# Altium PCB PCB1.PcbDoc
Units mil, origin at the board's own origin, x right, y up, seen from the top; angles counter-clockwise.
Board outline 3838.58 x 3838.58 mil, 2 copper layers (Top Layer, Bottom Layer); 128 components, 103 nets, 393 pads, 108 vias.
Unrouted connection lines stored in the file: 1.
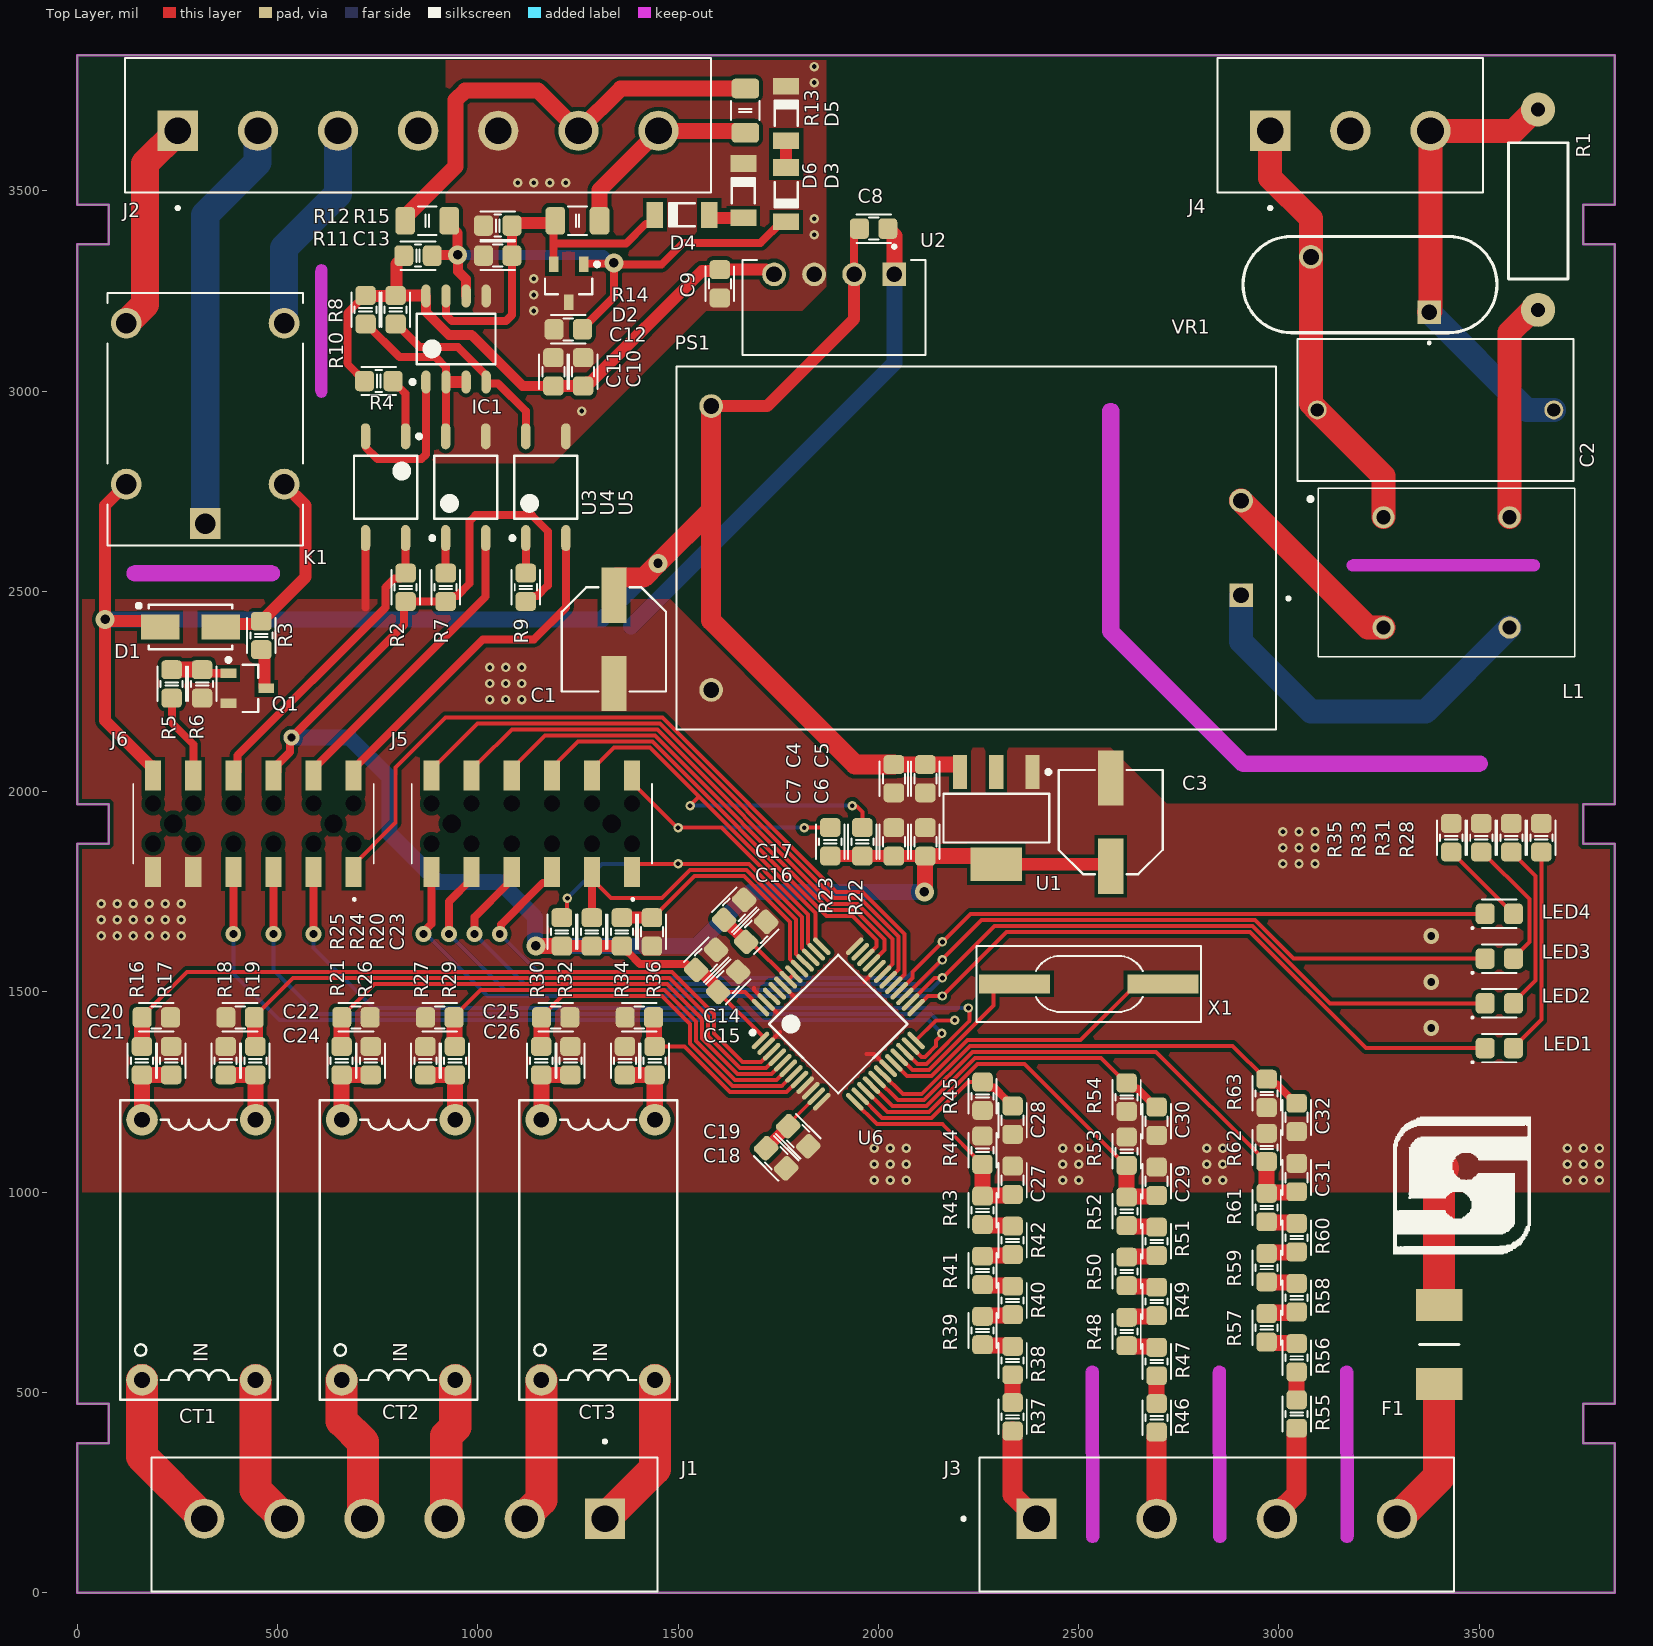
[diagram p0: Top Layer view]
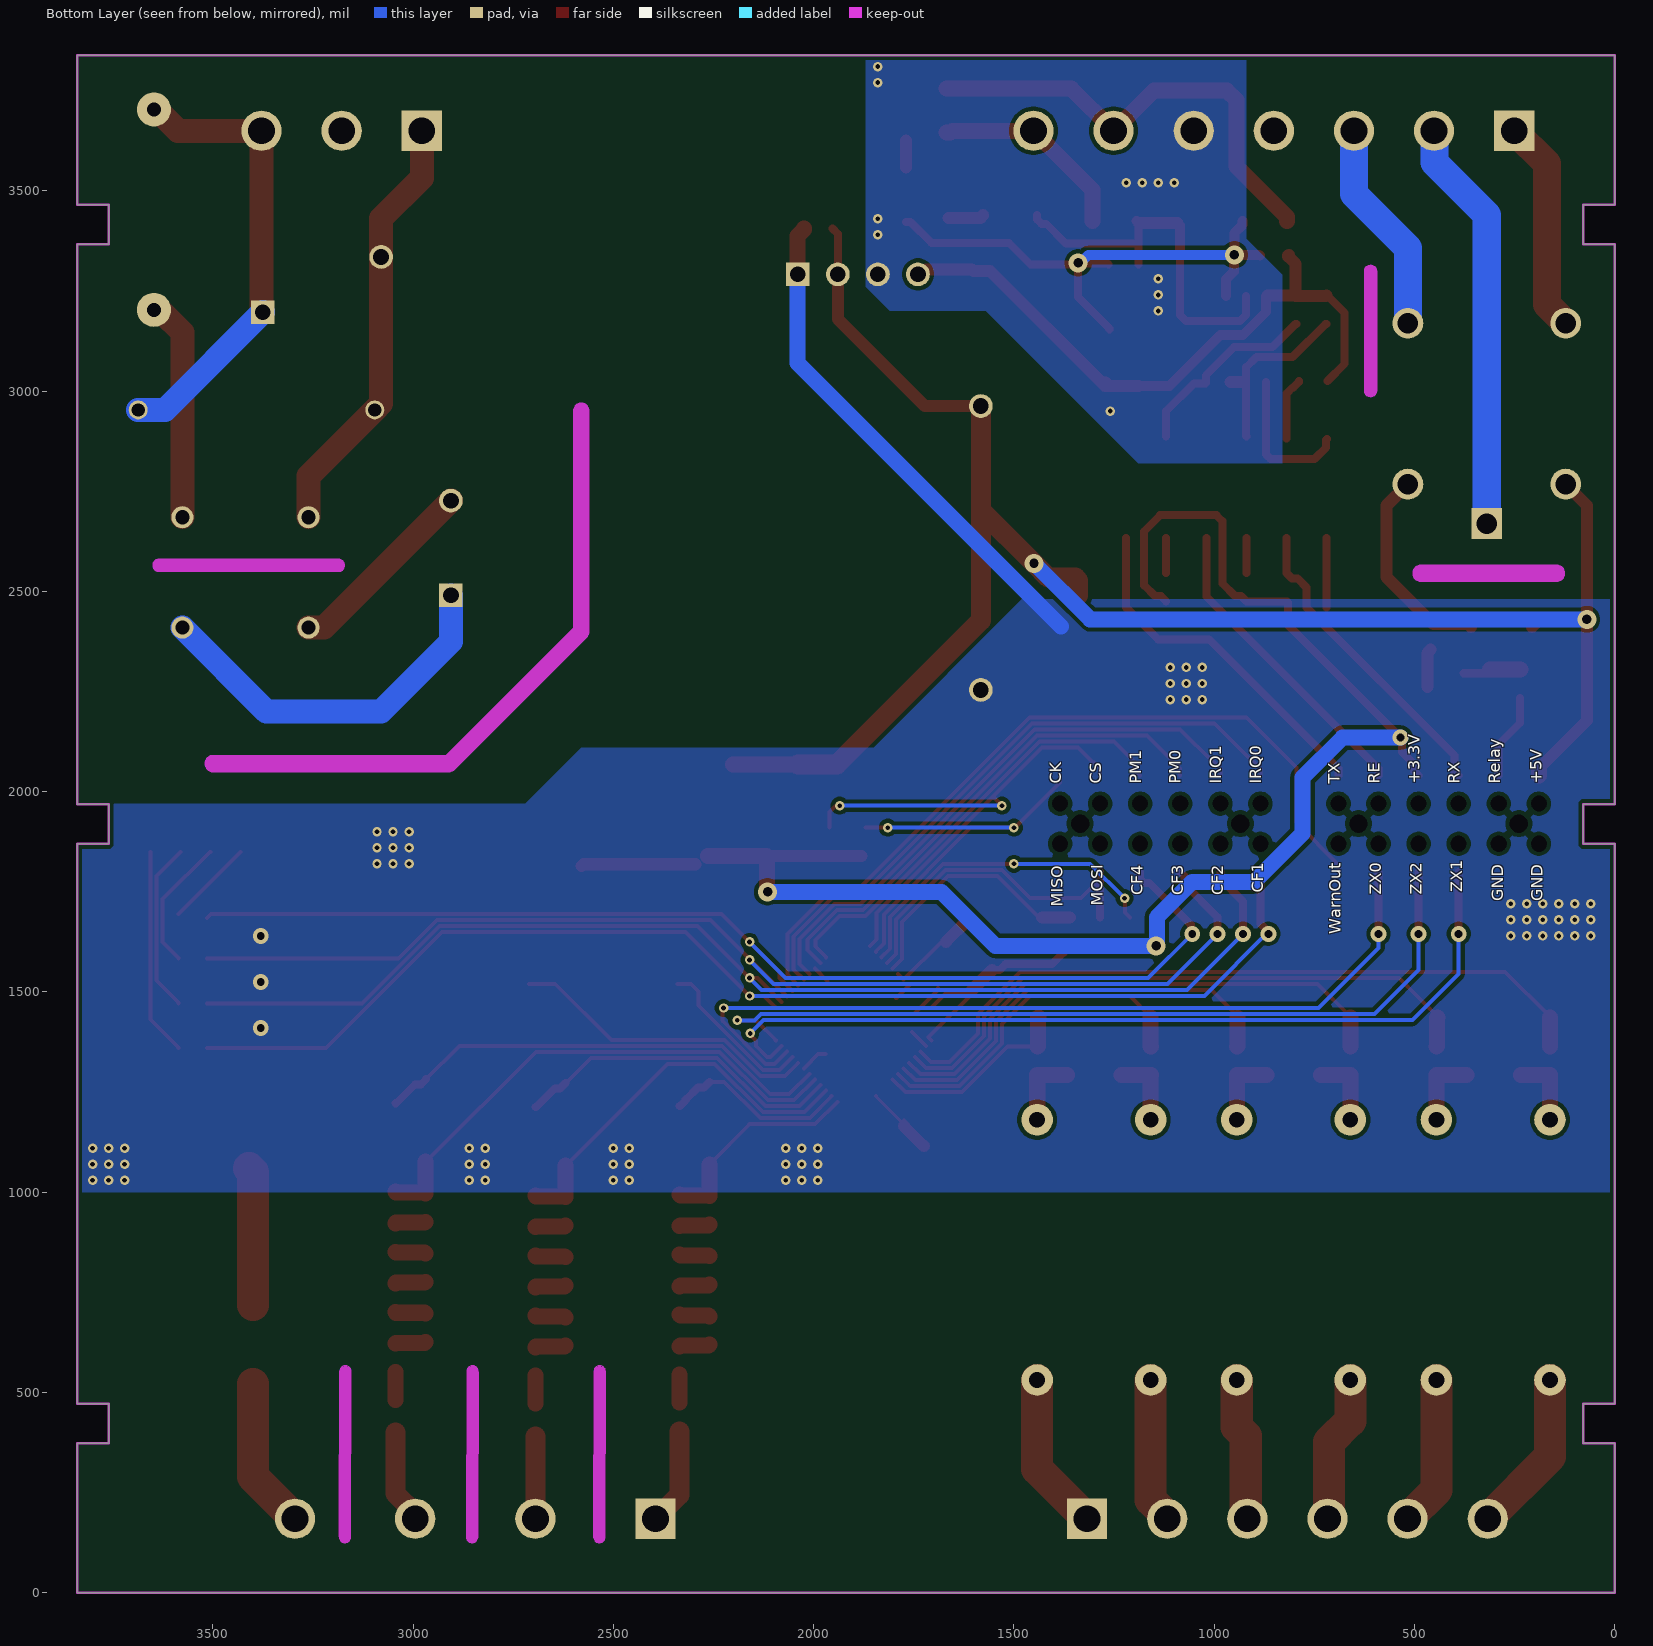
[diagram p1: Bottom Layer view, seen from below]
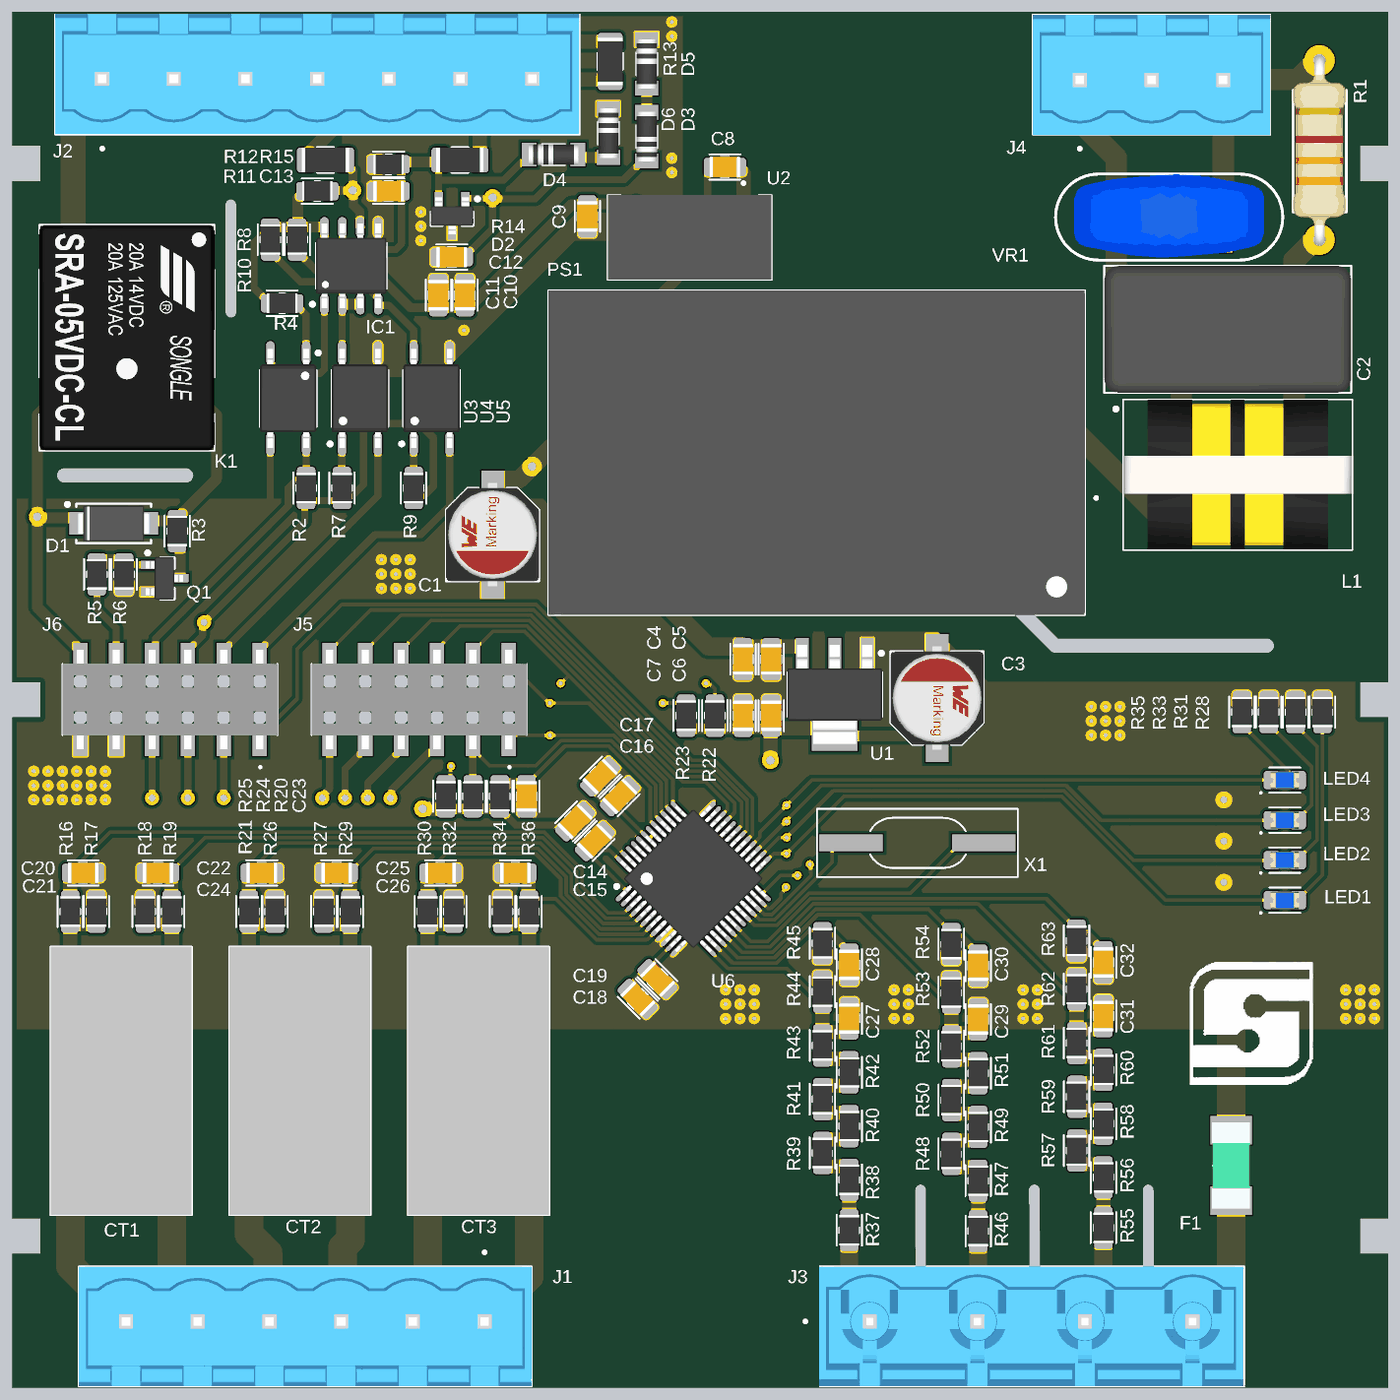
[diagram p2: 3D render of the assembled board from above, using the file's embedded part models]

## Layer stack, top to bottom
Top Solder: solder mask 0.4, Solder Resist, Dk 3.5
Top Layer: signal copper 1.4
Dielectric 1: dielectric 12.6, FR-4, Dk 4.8
Bottom Layer: signal copper 1.4
Bottom Solder: solder mask 0.4, Solder Resist, Dk 3.5

## Board outline
0,0 0,374.02 78.74,374.02 78.74,472.44 0,472.44 0,1870.08 78.74,1870.08 78.74,1968.5 0,1968.5 0,3366.14 78.74,3366.14 78.74,3464.57 0,3464.57 0,3838.58 3838.58,3838.58 3838.58,3464.57 3759.84,3464.57 3759.84,3366.14 3838.58,3366.14 3838.58,1968.5 3759.84,1968.5 3759.84,1870.08 3838.58,1870.08 3838.58,472.44 3759.84,472.44 3759.84,374.02 3838.58,374.02 3838.58,0
cut-out: 3154.99,139.96 3153.99,551.96 cw(c3169,552) 3184.01,552.04 3185.01,140.04 3185.01,140 cw(c3170,140)
cut-out: 2837.49,139.96 2836.49,551.96 cw(c2851.5,552) 2866.51,552.04 2867.51,140.04 2867.51,140 cw(c2852.5,140)
cut-out: 2519.99,139.96 2518.99,551.96 cw(c2534,552) 2549.01,552.04 2550.01,140.04 2550.01,140 cw(c2535,140)
cut-out: 3185,2549.99 cw(c3185,2565) 3185,2580.01 3635,2580.01 cw(c3635,2565) 3650.01,2565 cw(c3635,2565) 3635,2549.99
cut-out: 2565.88,2385.81 cw(c2580,2400) 2559.99,2400 2559.99,2950 cw(c2580,2950) 2600.01,2950 2600.01,2408.29 2918.29,2090.01 3500,2090.01 cw(c3500,2070) 3520.01,2070 cw(c3500,2070) 3500,2049.99 2910,2049.99 cw(c2910,2070) 2895.81,2055.88 2895.85,2055.85
cut-out: 594.99,3000 ccw(c610,3000) 625.01,3000 625.01,3300 ccw(c610,3300) 594.99,3300
cut-out: 145,2524.99 cw(c145,2545) 145,2565.01 485,2565.01 cw(c485,2545) 505.01,2545 cw(c485,2545) 485,2524.99

## Design rules (kind name [scope] priority, off if disabled: settings)
Clearance [All] p1: gap=10 ignorepadtopadclearanceinfootprint=FALSE except(5: Arc-Arc Arc-Track Arc-SMDPad Track-Track Track-SMDPad SMDPad-SMDPad)
MinimumSolderMaskSliver [All] p1: minsoldermaskwidth=5
PolygonConnect [All] p1: connectstyle=Direct reliefconductorwidth=10 reliefentries=4 polygonreliefangle="90 Angle" airgapwidth=10
RoutingVias small [All] p1: holewidth=11.81 width=19.68 viastyle="Through Hole" minholewidth=11.42 minwidth=19.29 maxholewidth=24.02 maxwidth=47.64
SilkToSilkClearance [All] p1: silktosilkclearance=5
SilkToSolderMaskClearance [IsPad] p1: minsilkscreentomaskgap=3 clearancetoexposedcopper=TRUE
SolderMaskExpansion [All] p1: expansion=4 istentingtop=FALSE
SupplyNets "Schematic Supply Nets_4" [InNet('+5V')] p1: voltage=0.000
SupplyNets "Schematic Supply Nets_3" [InNet('GND_RS485')] p2: voltage=0.000
SupplyNets "Schematic Supply Nets_2" [InNet('GND')] p3: voltage=0.000
SupplyNets "Schematic Supply Nets_1" [InNet('+5V_RS485')] p4: voltage=0.000
SupplyNets "Schematic Supply Nets" [InNet('+3.3V')] p5: voltage=0.000
Width [All] p1: maxlimit=80 minlimit=10 preferedwidth=20
27 further rules are at their usual default settings.

## Classes and differential pairs
component class Sheet3: C14 C15 C16 C17 C18 C19 C20 C21 C22 C23 C24 C25 C26 C27 C28 C29 C30 C31 C32 CT1 CT2 CT3 F1 J5 J6 LED1 LED2 LED3 LED4 R16 R17 R18 R19 R20 R21 R22 R23 R24 R25 R26 R27 R28 R29 R30 R31 R32 R33 R34 R35 R36 R37 R38 R39 R40 R41 R42 R43 R44 R45 R46 R47 R48 R49 R50 R51 R52 R53 R54 R55 R56 R57 R58 R59 R60 R61 R62 R63 U6 X1
component class Sheet2: C1 C2 C3 C4 C5 C6 C7 C8 C9 C10 C11 C12 C13 D1 D2 D3 D4 D5 D6 IC1 J1 J2 J3 J4 K1 L1 PS1 Q1 R1 R2 R3 R4 R5 R6 R7 R8 R9 R10 R11 R12 R13 R14 R15 U1 U2 U3 U4 U5 VR1

## Components (designator, comment, footprint, x,y, rotation, side; value= is the part's Value field where it differs from the comment)
C1 "220u/6.3V" CAP-ALU-SMD-6.3x7.7x2.2 1340,2380 r270 top
C2 "0.1u/660V" CAPRR1500W60L1750T900H1600 3390.75,2952.76 r0 top
C3 "100u/6.3V" CAP-ALU-SMD-6.3x7.7x2.2 2580,1924.13 r90 top
C4 "10u/6.3V" CAP_C_2012X110 2038.66,2032.4 r90 top
C5 "0.1u/6.3V" CAP_C_2012X110 2117.4,2032.4 r90 top
C6 "10u/6.3V" CAP_C_2012X110 2117.4,1874.61 r270 top
C7 "0.1u/6.3V" CAP_C_2012X110 2038.66,1874.61 r270 top
C8 "4.7u/6.3V" CAP_C_2012X110 1988.19,3405.51 r180 top
C9 "10u/6.3V" CAP_C_2012X110 1604.33,3267.72 r90 top
C10 "10u/6.3V" CAP_C_2012X110 1263,3048 r270 top
C11 "0.1u/6.3V" CAP_C_2012X110 1189,3048 r270 top
C12 "0.1n/16V" CAP_C_2012X110 1226,3154 r0 top
C13 "0.1n/16V" CAP_C_2012X110 1050,3338 r0 top
C14 "0.1u/16V" CAP_C_2012X110 1570,1580 r225 top
C15 "0.1u/16V" CAP_C_2012X110 1625,1525 r225 top
C16 "0.1u/16V" CAP_C_2012X110 1695,1650 r225 top
C17 "10u/16V" CAP_C_2012X110 1640,1705 r225 top
C18 "0.1u/16V" CAP_C_2012X110 1745,1085 r135 top
C19 "4.7u/16V" CAP_C_2012X110 1800,1140 r135 top
C20 "18n/16V" CAP_C_2012X110 197.87,1436.47 r180 top
C21 "18n/16V" CAP_C_2012X110 406.87,1436.47 r180 top
C22 "18n/16V" CAP_C_2012X110 696.22,1436.47 r180 top
C23 "0.1u/16V" CAP_C_2012X110 1435,1650 r90 top
C24 "18n/16V" CAP_C_2012X110 905.22,1436.47 r180 top
C25 "18n/16V" CAP_C_2012X110 1194.57,1436.47 r180 top
C26 "18n/16V" CAP_C_2012X110 1403.57,1436.47 r180 top
C27 "18n/16V" CAP_C_2012X110 2335,1030 r270 top
C28 "18n/16V" CAP_C_2012X110 2335,1180 r90 top
C29 "18n/16V" CAP_C_2012X110 2694.62,1027.54 r270 top
C30 "18n/16V" CAP_C_2012X110 2694.62,1177.54 r90 top
C31 "18n/16V" CAP_C_2012X110 3044.03,1036.83 r270 top
C32 "18n/16V" CAP_C_2012X110 3044.03,1186.83 r90 top
CT1 "ZHT107(5A/2.5mA)" ZHT107 303.82,856.3 r90 top
CT2 "ZHT107(5A/2.5mA)" ZHT107 802.17,856.3 r90 top
CT3 "ZHT107(5A/2.5mA)" ZHT107 1300.51,856.3 r90 top
D1 "DR_1KV_1A" DIOM5025X26N 283,2411 r0 top value=1N5007
D2 "SM712-02HTG" SOT95P237X112-3N 1227,3269 r270 top
D3 "DZ_12V" LL-34 1770,3490 r90 top
D4 "DZ_12V" LL-34 1510,3440 r0 top
D5 "DZ_7V" LL-34 1770,3693.11 r270 top
D6 "DZ_7V" LL-34 1663.08,3500 r270 top
F1 "F_1A" FUSC6127X294N 3400,620 r90 top value=Fuse
IC1 "MAX485" SOIC-8 945.87,3129.92 r90 top
J1 "TBP01R2-508-06BE" CUI_TBP01R2-508-06BE 1317.52,185.04 r180 top
J2 "TBP01R2-508-07BE" CUI_TBP01R2-508-07BE 251.38,3649.61 r0 top
J3 "TBP05R2-762-04BE" CUI_TBP05R2-762-04BE 2394.68,185.04 r0 top
J4 "TBP01R2-508-03BE" CUI_TBP01R2-508-03BE 3178.15,3649.61 r0 top
J5 "SSM-106-S-DV" SSM-106-XXX-DV-BE 1135,1920 r0 top
J6 "SSM-106-S-DV" SSM-106-XXX-DV-BE 440,1920 r0 top
K1 "SRA-05VDC-CL" RELAY_SRA-05VDC-CL 319.88,2929.13 r90 top
L1 "10mH" UU98LFH142LF 3418.31,2547.24 r0 top
LED1 "LED" LED-0805-Blue 3550,1360 r0 top value="LED 3 - 5 ly 2 Colour"
LED2 "LED" LED-0805-Blue 3550,1471.67 r0 top value="LED 3 - 5 ly 2 Colour"
LED3 "LED" LED-0805-Blue 3550,1583.33 r0 top value="LED 3 - 5 ly 2 Colour"
LED4 "LED" LED-0805-Blue 3550,1695 r0 top value="LED 3 - 5 ly 2 Colour"
PS1 "HLK-5M05" CONV_HLK-5M05 2244.09,2608.27 r180 top
Q1 "BC817W" SOT95P237X112-3N 425,2258 r0 top
R1 "6R8/5%/1W" RES-1W 3646.65,3452.76 r270 top
R2 "330R/1%" RES_C_2012X65 820,2510 r90 top
R3 "0R/1%" RES_C_2012X65 460,2390 r90 top
R4 "560R/5%" RES_C_2012X65 753,3025 r180 top
R5 "1K/1%" RES_C_2012X65 236,2269 r90 top
R6 "5.1K/1%" RES_C_2012X65 312,2269 r90 top
R7 "330R/1%" RES_C_2012X65 920,2510 r90 top
R8 "560R/5%" RES_C_2012X65 720,3203 r90 top
R9 "330R/1%" RES_C_2012X65 1120,2510 r90 top
R10 "560R/5%" RES_C_2012X65 795,3203 r90 top
R11 "2K2/5%" RES_C_2012X65 851,3338 r180 top
R12 "10R/1%" RES_C_3216X70 874,3425 r180 top
R13 "120R/1%" RES_C_3216X70 1668,3700 r90 top
R14 "10R/1%" RES_C_3216X70 1249,3425 r0 top
R15 "2K2/5%" RES_C_2012X65 1050,3413 r0 top
R16 "1K/1%" RES_C_2012X65 161.87,1328.47 r90 top
R17 "2.4R/1%" RES_C_2012X65 234.87,1328.47 r90 top
R18 "2.4R/1%" RES_C_2012X65 370.87,1328.47 r270 top
R19 "1K/1%" RES_C_2012X65 444.87,1328.47 r90 top
R20 "5.1K/1%" RES_C_2012X65 1360,1650 r270 top
R21 "1K/1%" RES_C_2012X65 660.22,1328.47 r90 top
R22 "5.1K/1%" RES_C_2012X65 1960,1875 r270 top
R23 "5.1K/1%" RES_C_2012X65 1880,1875 r270 top
R24 "5.1K/1%" RES_C_2012X65 1285,1650 r270 top
R25 "5.1K/1%" RES_C_2012X65 1210,1650 r270 top
R26 "2.4R/1%" RES_C_2012X65 733.22,1328.47 r90 top
R27 "2.4R/1%" RES_C_2012X65 869.22,1328.47 r270 top
R28 "750R/1%" RES_C_2012X65 3655,1885 r90 top
R29 "1K/1%" RES_C_2012X65 943.22,1328.47 r90 top
R30 "1K/1%" RES_C_2012X65 1158.57,1328.47 r90 top
R31 "750R/1%" RES_C_2012X65 3580,1885 r90 top
R32 "2.4R/1%" RES_C_2012X65 1231.57,1328.47 r90 top
R33 "750R/1%" RES_C_2012X65 3505,1885 r90 top
R34 "2.4R/1%" RES_C_2012X65 1367.57,1328.47 r270 top
R35 "750R/1%" RES_C_2012X65 3430,1885 r90 top
R36 "1K/1%" RES_C_2012X65 1441.57,1328.47 r90 top
R37 "240K/1%" RES_C_2012X65 2334.99,439.57 r270 top
R38 "240K/1%" RES_C_2012X65 2335,580 r270 top
R39 "240K/1%" RES_C_2012X65 2260,655 r270 top
R40 "240K/1%" RES_C_2012X65 2335,730 r270 top
R41 "240K/1%" RES_C_2012X65 2260,805 r270 top
R42 "240K/1%" RES_C_2012X65 2335,880 r270 top
R43 "240K/1%" RES_C_2012X65 2260,955 r270 top
R44 "1K/1%" RES_C_2012X65 2260,1105 r90 top
R45 "1K/1%" RES_C_2012X65 2260,1240 r270 top
R46 "240K/1%" RES_C_2012X65 2694.61,437.11 r270 top
R47 "240K/1%" RES_C_2012X65 2694.62,577.54 r270 top
R48 "240K/1%" RES_C_2012X65 2619.62,652.54 r270 top
R49 "240K/1%" RES_C_2012X65 2694.62,727.54 r270 top
R50 "240K/1%" RES_C_2012X65 2619.62,802.54 r270 top
R51 "240K/1%" RES_C_2012X65 2694.62,877.54 r270 top
R52 "240K/1%" RES_C_2012X65 2619.62,952.54 r270 top
R53 "1K/1%" RES_C_2012X65 2619.62,1102.54 r90 top
R54 "1K/1%" RES_C_2012X65 2619.62,1237.54 r270 top
R55 "240K/1%" RES_C_2012X65 3044.03,446.4 r270 top
R56 "240K/1%" RES_C_2012X65 3044.03,586.83 r270 top
R57 "240K/1%" RES_C_2012X65 2969.03,661.83 r270 top
R58 "240K/1%" RES_C_2012X65 3044.03,736.83 r270 top
R59 "240K/1%" RES_C_2012X65 2969.03,811.83 r270 top
R60 "240K/1%" RES_C_2012X65 3044.03,886.83 r270 top
R61 "240K/1%" RES_C_2012X65 2969.03,961.83 r270 top
R62 "1K/1%" RES_C_2012X65 2969.03,1111.83 r90 top
R63 "1K/1%" RES_C_2012X65 2969.03,1246.83 r270 top
U1 "LM1117-3.3V" SOT230P700X180-4N 2294.57,1933.98 r270 top
U2 "B0505S" B0505S-1W 1889.76,3208.66 r180 top
U3 "TLP185" SOP254P700X220-4N 770,2760 r270 top value=PC817
U4 "TLP185" SOP254P700X220-4N 970,2760 r90 top value=PC817
U5 "TLP185" SOP254P700X220-4N 1170,2760 r90 top value=PC817
U6 "ATM90E32AS-AU-R" TSQFP50P900X900X120-48N 1900,1420 r45 top
VR1 "470V/4.5KA" B72214P2301K101 3375,3196.85 r180 top
X1 "16.384Mhz" XT2-SMD 2520,1520 r180 top value=4Mhz

## Footprints (in the part's own frame and the unit in brackets; to place one, negate y for a bottom-side part, rotate by r counter-clockwise, add the part's x,y. Pads: shape width x height; smd on the part's side, far side on the other; paste and mask are expansions set on the pad)
B0505S-1W [mm]
  rect 1.508x1.508 / inner round 1.508 / far side rect 1.508x1.508 hole 1: 1(-3.81,-2.1)
  round 1.508 hole 1: 2(-1.27,-2.1) 3(1.27,-2.1) 4(3.81,-2.1)
  silkscreen extent -5.8,-3.95 5.8,3, body extent -5.8,-3.01 5.8,2.99, height 10.16
B72214P2301K101 [mm]
  rect 1.5x1.5 hole 1: 1(0,0)
  round 1.5 hole 1: 2(7.5,-3.5)
  silkscreen extent -4.3,-4.8 11.8,2, body extent -3,-4.77 10.5,1.11, height 17.97
CAP-ALU-SMD-6.3x7.7x2.2 [mm]
  rect 3.5x1.6 smd: 1(-2.8,0) 2(2.8,0)
  silkscreen extent -3.3,-3.3 3.3,3.3, body extent -3.65,-3.3 3.65,3.3, height 7.65
CAP_C_2012X110 [mm] "Chip Capacitor, 2-Leads, Body 2.00x1.25mm, IPC High Density"
  rrect41% 1.2x1.3 smd: 1(-0.9,0) 2(0.9,0)
  silkscreen extent -1.1,-0.9 1.1,0.9, body extent -1.1,-0.72 1.1,0.72, height 1.1
CAPRR1500W60L1750T900H1600 [mm]
  round 1.2 hole 0.85: 1(-7.5,0) 2(7.5,0)
  silkscreen extent -8.75,-4.5 8.75,4.5, body extent -8.75,-4.5 8.75,4.5, height 16
CONV_HLK-5M05 [mm]
  rect 1.5x1.5 / inner round 1.5 / far side rect 1.5x1.5 hole 1: 1(-16.8,3)
  round 1.5 hole 1: 2(-16.8,-3) 3(16.8,9) 4(16.8,-9)
  silkscreen extent -19.9,-11.5 19,11.5, body extent -19,-11.5 19,11.5, height 18
CUI_TBP01R2-508-03BE [mm]
  rect 2.55x2.55 / inner round 2.55 / far side rect 2.55x2.55 hole 1.7: 1(-5.08,0)
  round 2.55 hole 1.7: 2(0,0) 3(5.08,0)
  silkscreen extent -8.42,-5 8.42,4.6, body extent -8.42,-3.93 8.42,4.57, height 12.1
CUI_TBP01R2-508-06BE [mm]
  rect 2.55x2.55 / inner round 2.55 / far side rect 2.55x2.55 hole 1.7: 1(0,0)
  round 2.55 hole 1.7: 2(5.08,0) 3(10.16,0) 4(15.24,0) 5(20.32,0) 6(25.4,0)
  silkscreen extent -3.34,-5 28.74,4.6, body extent -3.34,-3.9 28.74,4.6, height 12.1
CUI_TBP01R2-508-07BE [mm]
  rect 2.55x2.55 / inner round 2.55 / far side rect 2.55x2.55 hole 1.7: 1(0,0)
  round 2.55 hole 1.7: 2(5.08,0) 3(10.16,0) 4(15.24,0) 5(20.32,0) 6(25.4,0) 7(30.48,0)
  silkscreen extent -3.34,-5 33.82,4.6, body extent -3.36,-3.85 33.8,4.65, height 12.1
CUI_TBP05R2-762-04BE [mm]
  rect 2.55x2.55 / inner round 2.55 / far side rect 2.55x2.55 hole 1.7: 1(0,0)
  round 2.55 hole 1.7: 2(7.62,0) 3(15.24,0) 4(22.86,0)
  silkscreen extent -4.72,-4.6 26.46,3.9, body extent -3.66,-4.6 26.4,3.9, height 12
DIOM5025X26N [mm] "Molded Diode, 2-Leads, Body 5.00x2.50mm, IPC Medium Density"
  rect 2.45x1.6 smd: 1(1.925,0) 2(-1.925,0)
  silkscreen extent -3.4,-1.4 2.65,1.47, body extent -2.57,-1.28 2.57,1.28, height 2.5
FUSC6127X294N [mm]
  rect 2.02x2.95 smd: 1(-2.5,0) 2(2.5,0)
  silkscreen extent 0,-1.24 0,1.24, body extent -3.05,-1.35 3.05,1.35, height 2.94
LED-0805-Blue [mm]
  rrect41% 1.2x1.3 smd: 1(-0.9,0) 2(0.9,0)
  silkscreen extent -1.75,-0.95 1.1,0.9, body extent -1.01,-0.63 1.01,0.63, height 1.1
LL-34 [mm] "MELF Diode, 2-Leads, Body 3.50x1.45mm, IPC Medium Density"
  rect 1.05x1.65 smd: 1(-1.725,0) 2(1.725,0)
  silkscreen extent -0.8,-0.73 0.8,0.72, body extent -1.75,-0.72 1.75,0.72, height 1.45
RELAY_SRA-05VDC-CL [mm]
  round 1.95 hole 1.3: COIL1(-4.1,5) COIL2(-4.1,-5) NC(6.1,5) NO(6.1,-5)
  rect 1.95x1.95 / inner round 1.95 / far side rect 1.95x1.95 hole 1.3: COM(-6.6,0)
  silkscreen extent -8,-6.2 8,6.2, body extent -8,-6.2 8,6.2, height 14
RES-1W [mil]
  round 85 hole 35: 1(-250,0) 2(250,0)
  silkscreen extent -167,-74 173,75, body extent -265,-74 265,74, height 189
RES_C_2012X65 [mm] "Chip Resistor, 2-Leads, Body 2.00x1.25mm, IPC High Density"
  rrect41% 1.2x1.3 smd: 1(-0.9,0) 2(0.9,0)
  silkscreen extent -1.1,-0.9 1.1,0.9, body extent -1.07,-0.7 1.07,0.7, height 0.65
RES_C_3216X70 [mm] "Chip Resistor, 2-Leads, Body 3.20x1.60mm, IPC Medium Density"
  rrect39% 1.25x1.75 smd: 1(-1.4,0) 2(1.4,0)
  silkscreen extent -0.6,-0.9 0.6,0.9, body extent -1.68,-0.87 1.68,0.87, height 0.71
SOIC-8 [mm] "SOIC, 8-Leads, Body 4.91x3.90mm, Pitch 1.27mm, IPC Medium Density"
  oval 1.45x0.6 smd: 1(-2.725,1.905) 2(-2.725,0.635) 3(-2.725,-0.635) 4(-2.725,-1.905) 5(2.725,-1.905) 6(2.725,-0.635) 7(2.725,0.635) 8(2.725,1.905)
  silkscreen extent -2.85,-2.5 1.6,2.88, body extent -3,-2.5 3,2.5, height 1.75
SOP254P700X220-4N [mm] "SOP, 4-Leads, Body 3.75x4.60mm, Pitch 2.54mm, IPC Medium Density"
  oval 1.65x0.6 smd: 1(-3.225,1.27) 2(-3.225,-1.27) 3(3.225,-1.27) 4(3.225,1.27)
  silkscreen extent -3.35,-2 2,2.25, body extent -3.5,-2 3.5,2, height 2.2
SOT95P237X112-3N [mm] "SOT23, 3-Leads, Body 2.92x2.37mm, Pitch 0.95mm, IPC Medium Density"
  rect 1x0.6 smd: 1(-1.2,0.95) 2(-1.2,-0.95) 3(1.2,0)
  silkscreen extent -1.32,-1.5 0.7,1.93, body extent -1.32,-1.52 1.32,1.52, height 1.12
SOT230P700X180-4N [mm] "SOT223, 4-Leads, Body 6.50x7.00mm (avg), Pitch 2.30mm, IPC Medium Density"
  rect 2.15x0.9 smd: 1(-2.925,2.3) 2(-2.925,0) 3(-2.925,-2.3)
  rect 2.15x3.25 smd: 4(2.925,0)
  silkscreen extent -3.05,-3.35 1.55,3.43, body extent -3.5,-3.35 3.5,3.35, height 1.8
SSM-106-XXX-DV-BE [mm]
  rect 1.02x1.905 smd: 1(6.35,-3.047) 2(6.35,3.047) 3(3.81,-3.047) 4(3.81,3.047) 5(1.27,-3.047) 6(1.27,3.047) 7(-1.27,-3.047) 8(-1.27,3.047) 9(-3.81,-3.047) 10(-3.81,3.047) 11(-6.35,-3.047) 12(-6.35,3.047)
  round 0.585 hole 1.17 unplated: 13(5.08,0) 14(-5.08,0)
  round 0.51 hole 1.02 unplated: 13(6.35,-1.27) 14(6.35,1.27) 15(3.81,-1.27) 16(3.81,1.27) 17(1.27,-1.27) 18(1.27,1.27) 19(-1.27,-1.27) 20(-1.27,1.27) 21(-3.81,-1.27) 22(-3.81,1.27) 23(-6.35,-1.27) 24(-6.35,1.27)
  silkscreen extent -7.62,-4.85 7.62,2.54, body extent -7.62,-3.52 7.62,3.52, height 7.5
TSQFP50P900X900X120-48N [mm] "TSQFP, 48-Leads, Body 7.00x7.00mm, Pitch 0.50mm, IPC Medium Density"
  oval 1.45x0.3 smd: 1(-4.225,2.75) 2(-4.225,2.25) 3(-4.225,1.75) 4(-4.225,1.25) 5(-4.225,0.75) 6(-4.225,0.25) 7(-4.225,-0.25) 8(-4.225,-0.75) 9(-4.225,-1.25) 10(-4.225,-1.75) 11(-4.225,-2.25) 12(-4.225,-2.75) 25(4.225,-2.75) 26(4.225,-2.25) 27(4.225,-1.75) 28(4.225,-1.25) 29(4.225,-0.75) 30(4.225,-0.25) 31(4.225,0.25) 32(4.225,0.75) 33(4.225,1.25) 34(4.225,1.75) 35(4.225,2.25) 36(4.225,2.75)
  oval 0.3x1.45 smd: 13(-2.75,-4.225) 14(-2.25,-4.225) 15(-1.75,-4.225) 16(-1.25,-4.225) 17(-0.75,-4.225) 18(-0.25,-4.225) 19(0.25,-4.225) 20(0.75,-4.225) 21(1.25,-4.225) 22(1.75,-4.225) 23(2.25,-4.225) 24(2.75,-4.225) 37(2.75,4.225) 38(2.25,4.225) 39(1.75,4.225) 40(1.25,4.225) 41(0.75,4.225) 42(0.25,4.225) 43(-0.25,4.225) 44(-0.75,4.225) 45(-1.25,4.225) 46(-1.75,4.225) 47(-2.25,4.225) 48(-2.75,4.225)
  silkscreen extent -4.35,-3.1 3.1,3.57, body extent -4.5,-4.5 4.5,4.5, height 1.2
UU98LFH142LF [mm]
  round 1.4 hole 0.9: 1(-4,3.5) 2(-4,-3.5) 3(4,-3.5) 4(4,3.5)
  silkscreen extent -8.75,-5.33 8.13,5.33, body extent -8.08,-5.3 8.08,5.3, height 15.3
XT2-SMD [mm]
  rect 4.5x1.2 smd: 1(-4.826,0) 2(4.572,0)
  silkscreen extent -7.24,-2.41 6.99,2.41, body extent -6.53,-2.41 6.27,2.42, height 4.3
ZHT107 [mm]
  round 2 hole 1: 1(-8.25,3.6) 2(-8.25,-3.6) 3(8.25,3.6) 4(8.25,-3.6)
  silkscreen extent -9.51,-5.01 9.49,4.99, body extent -9.5,-5 9.5,5, height 18.5

## Part data
C1 C3: library part CAP_POLAR
C2 C4 C5 C6 C7 C8 C9 C10 C11 C12 C13 C14 C15 C16 C17 C18 C19 C20 C21 C22 C23 C24 C25 C26 C27 C28 C29 C30 C31 C32: library part CAP_SMD
CT1 CT2 CT3: library part ZHT-107, "C5183046"
D1: library part Diode, "Default Diode", Code - JEDEC=DO-214-AB, Published=8-Jun-2000, Publisher="Altium Limited", Revision="July-2002: Re-released for DXP Platform."
D2: "TVS Diode, SM712 Series, 31V Clamp, 600W Peak Pulse, Surface Mount, SOT23-3", Package="SOT-23 Littelfuse Inc.", Check_prices=https://www.snapeda.com/parts/SM712-02HTG/Littelfuse/view-part/?ref=eda, MF="Littelfuse Inc.", MP=SM712-02HTG, SnapEDA_Link=https://www.snapeda.com/parts/SM712-02HTG/Littelfuse/view-part/?ref=snap
D3 D4 D5 D6: library part "DIODE Zener", "Zenner"
F1: library part Fuse, "Fuse", Designed by=VanDungEvn
IC1: "RS232 - RS485 (Same sn75176)"
J1: "2~24 Ð¿Ð¾Ð»ÑŽÑÐ°, Ð¿Ð¾Ð´ÐºÐ»ÑŽÑ‡Ð°ÐµÐ¼Ñ‹Ð¹, Ð²ÐµÑ€Ñ‚Ð¸ÐºÐ°Ð»ÑŒÐ½Ñ‹Ð¹, ÑˆÐ°Ð³ 5,08, ÐºÐ»ÐµÐ¼Ð¼Ð½Ñ‹Ð¹ Ð±Ð»Ð¾Ðº", Package=None, Check_prices=https://www.snapeda.com/parts/TBP01R2-508-06BE/Same+Sky/view-part/?ref=eda, MF="Same Sky", MP=TBP01R2-508-06BE, SnapEDA_Link=https://www.snapeda.com/parts/TBP01R2-508-06BE/Same+Sky/view-part/?ref=snap
J2 J4: "2~24 Poles, Pluggable, Receptacle, Vertical, 5.08 Pitch, Terminal Block Connector", Package=None, MF="Same Sky"
  J2: Check_prices=https://www.snapeda.com/parts/TBP01R2-508-07BE/Same+Sky/view-part/?ref=eda, MP=TBP01R2-508-07BE, SnapEDA_Link=https://www.snapeda.com/parts/TBP01R2-508-07BE/Same+Sky/view-part/?ref=snap
  J4: Check_prices=https://www.snapeda.com/parts/TBP01R2-508-03BE/Same+Sky/view-part/?ref=eda, MP=TBP01R2-508-03BE, SnapEDA_Link=https://www.snapeda.com/parts/TBP01R2-508-03BE/Same+Sky/view-part/?ref=snap
J3: "2~24 Poles, Pluggable, Receptacle, Vertical, 7.62 Pitch, Terminal Block Connector", Package=None, Check_prices=https://www.snapeda.com/parts/TBP05R2-762-04BE/Same+Sky/view-part/?ref=eda, MF="Same Sky", MP=TBP05R2-762-04BE, SnapEDA_Link=https://www.snapeda.com/parts/TBP05R2-762-04BE/Same+Sky/view-part/?ref=snap
J5 J6: "Connector", Arrow Part Number=SSM-105-S-DV, Manufacturer_Name=SAMTEC, Mouser Part Number=200-SSM105SDV, Arrow Price/Stock=https://www.arrow.com/en/products/ssm-105-s-dv/samtec, Datasheet Link=https://mm.digikey.com/Volume0/opasdata/d220001/medias/docus/6129/ssm-1xx-xxx-dv-xx-xx-xxx-x-xx-mkt.pdf, Manufacturer_Part_Number=SSM-105-S-DV, Mouser Price/Stock=https://www.mouser.co.uk/ProductDetail/Samtec/SSM-105-S-DV?qs=XtX6y9BSeMiNY1vJI%2FFCQQ%3D%3D
K1: Package=Package, Check_prices=https://www.snapeda.com/parts/SRA-05VDC-CL/Songle+Relay/view-part/?ref=eda, MF="Songle Relay", MP=SRA-05VDC-CL, SnapEDA_Link=https://www.snapeda.com/parts/SRA-05VDC-CL/Songle+Relay/view-part/?ref=snap
L1: library part L-DIP-2, Manufacturer="Würth Elektronik eiSos GmbH", PartNo=744284100, ComponentLink1Description=Manufacturer, ComponentLink1URL=http://www.we-online.de, ComponentLink2Description=Datasheet, ComponentLink2URL=http://www.we-online.de/katalog/media/pdf/744284100.pdf, Created by="Christin Zierenner", Created Date="March 2012", Inductance=10mH
LED1 LED2 LED3 LED4: library part "LED SMD"
PS1: "AC DC 220V to 5V 5W 5Watt Isolated Switching Step-Down Power Supply Module Converter", Package=Package, Availability="Not in stock", Check_prices=https://www.snapeda.com/parts/HLK-5M05/Hi-link/view-part/?ref=eda, MF=Hi-link, MP=HLK-5M05, Price=None, SnapEDA_Link=https://www.snapeda.com/parts/HLK-5M05/Hi-link/view-part/?ref=snap
Q1: library part BJT_NPN
R1 R2 R3 R4 R5 R6 R7 R8 R9 R10 R11 R12 R13 R14 R15 R16 R17 R18 R19 R20 R21 R22 R23 R24 R25 R26 R27 R28 R29 R30 R31 R32 R33 R34 R35 R36 R37 R38 R39 R40 R41 R42 R43 R44 R45 R46 R47 R48 R49 R50 R51 R52 R53 R54 R55 R56 R57 R58 R59 R60 R61 R62 R63: library part Res-SMD, "Resistor", Manufacturer="Generic Components", Class=Passive, Published=08/06/2000, Publisher="Altium Hobart Technology Centre"
U1: library part LM1117, "800mA Low-Dropout Linear Regulator", Creator="Nguyen Ba Bien", Website=http://group3i.net
U3 U4 U5: "Single Opto"
U6: "IC ENERGY METER 1.8V/3V 48TQFP", Package="TQFP-48 Microchip", Availability=Warning, MF=Microchip, MP=ATM90E32AS-AU-R, Price=None, Purchase-URL=https://pricing.snapeda.com/search/part/ATM90E32AS-AU-R/?ref=eda, SnapEDA_Link=https://www.snapeda.com/parts/ATM90E32AS-AU-R/Microchip/view-part/592639/?ref=snap
VR1: library part Varistor, "MOV-14D471K, Varistors 470V 14mm"
X1: library part XT2, "Crystal, 32.768 KHz, -40 to 85 degC, 3.2 x 1.5 x 0.9 mm SMD"

## Via types
v1: diameter 23.62, hole 11.81, Top Layer to Bottom Layer, 91 vias
v2: diameter 39.37, hole 19.68, Top Layer to Bottom Layer, 11 vias
v3: diameter 47.24, hole 23.62, Top Layer to Bottom Layer, 4 vias
v4: diameter 47.64, hole 24.02, Top Layer to Bottom Layer, 2 vias

## Nets (pads, with @x,y where several pads share a name; then routed paths per layer and width w, separated by ;. In a path a pad name is that pad's centre, name@x,y a point inside that pad or via, vN(x,y) a via of type N, cw(c..) or ccw(c..) an arc to the next point about the centre after c; other vN are vias at no path point)
+3.3V: C3.1 C6.2 C7.2 C14.2 C15.2 J6.6 R2.1 R7.1 R9.1 R20.2 R22.2 R23.2 R24.2 R25.2 U1.2 U1.4 U6.1 U6.48 | length 4856.3
  Top Layer w10: U6.1 1712.8,1385.91 1712.8,1387.09 C15.2 1666.95,1499.94 U6.48
  Top Layer w20: J6.6 500.08,2050.06 500.08,2067.48 531.29,2098.7 531.29,2131.29 815.7,2415.7 815.7,2472.25 818.03,2474.57 R7.1 933.62,2488.19 948.19,2488.19 980,2520 980,2675 995,2690 1135,2690 1175,2650 1175,2515 1148.19,2488.19 1133.62,2488.19 R9.1 ; R20.2 1361.97,1614.57 1375.6,1600.94 1375.6,1598.98 1404.57,1570 1520.63,1570 1535.68,1554.94 C14.2 C14.2@1554.95,1554.94
  Top Layer w30: R25.2@1220.01,1614.57 R24.2 R20.2 ; C14.2@1554.95,1554.94 C15.2@1604.95,1504.94 ; R23.2 1880.2,1839.37 2036.5,1839.37 C7.2@2036.65,1839.22 ; C7.2@2036.7,1839.17 C7.2 C6.2 ; U1.4 2575.08,1818.82 C3.1
  Top Layer w40: v4(1145,1615) 1145.22,1614.78 1209.79,1614.78 R25.2 ; v4(2115,1750) 2116.2,1751.2 2116.2,1837.97 C6.2 U1.4@2264.17,1839.17
  Bottom Layer w40: v2(535,2135) 680,2135 780,2035 780,1895 900,1775 1055,1775 1143.54,1686.46 1143.54,1616.46 v4(1145,1615) 1546.47,1615 1681.47,1750 v4(2115,1750)
+5V: C1.1 C4.2 C5.2 C8.2 D1.2 J6.12 K1.COIL1 PS1.4 U1.3 U2.2 | length 4722.1
  Top Layer w20: U2.2 1939.76,3392.51 C8.2
  Top Layer w30: K1.COIL1 70,2714.69 v3(70,2430) ; J6.12@189.92,2057.48 70,2177.4 v3(70,2430) ; D1.2 192.04,2426.17 73.83,2426.17 v3(70,2430) ; PS1.4 1722.6,2962.6 1939.76,3179.76 U2.2
  Top Layer w40: J6.12@189.92,2057.48 189.92,2040.06 J6.12 ; C4.2 C5.2 ; C5.2@2111.8,2067.83 U1.3@2201.73,2067.83
  Top Layer w50: C1.1 1340,2527.64 1346.5,2534.13 1414.13,2534.13 v3(1450,2570) 1582.68,2702.68 ; PS1.4 1582.68,2702.68 ; C4.2 1942.17,2067.83 1582.68,2427.32 1582.68,2702.68
  Bottom Layer w40: v3(70,2430) 1310,2430 v3(1450,2570)
+5V_RS485: C9.2 C10.2 C11.2 IC1.8 R4.2 R8.2 R10.2 R11.2 U2.4 | length 1639.8
  Top Layer w20: R4.2 674.4,3068.16 674.4,3194.81 718.03,3238.43 R8.2
  Top Layer w25: IC1.8 870.87,3197.22 928.08,3140 985,3140 1112.43,3012.57 C11.2
  Top Layer w30: R8.2 720.61,3237.82 796.96,3237.82 796.96,3317.42 815.57,3336.03 R11.2 R11.2@813.56,3340 ; R10.2 IC1.8@867.68,3238.43 ; C11.2 1272.57,3012.57 C10.2@1272.57,3020.16 ; C10.2 1271.63,3021.19 1281.19,3021.19 1560.19,3300.19 1601.37,3300.19 C9.2 1720.01,3303.15 1731.82,3291.34 U2.4
CF1: J5.11 LED1.1 U6.25 | length 3140.8
  Top Layer w10: U6.25 2094.67,1461.06 2111.58,1477.98 2111.93,1477.98 2123.95,1490 v1(2160,1490) 2320,1650 2927.57,1650 3217.57,1360.01 LED1.1
  Top Layer w20: v2(865,1645) 865,1650.24 885,1670.24 J5.11
  Bottom Layer w10: v2@866.77,1648.23 1025,1490 v1(2160,1490)
CF2: J5.9 LED2.1 U6.26 | length 3077.4
  Top Layer w10: U6.26 2140.27,1535 v1(2160,1535) ; v1@2157.39,1532.39 v1(2160,1535) ; LED2.1 3127.11,1471.67 2933.79,1665 2290,1665 v1(2160,1535)
  Top Layer w20: v2(928.33,1645) 928.33,1725.93 985,1782.6 J5.9
  Bottom Layer w10: v2(928.33,1645) 1068.33,1505 2130,1505 v1(2160,1535)
CF3: J5.7 LED3.1 U6.27 | length 3007.6
  Top Layer w10: U6.27 2066.83,1488.9 2157.93,1580 v1(2160,1580) 2160,1582.56 2257.44,1680 2940,1680 3036.66,1583.34 LED3.1
  Top Layer w20: v2(991.67,1645) 991.67,1686.67 1074.92,1769.92 1074.92,1789.94 J5.7
  Bottom Layer w10: v2(991.67,1645) 1116.67,1520 2100,1520 v1(2160,1580)
CF4: J5.5 LED4.1 U6.28 | length 2958.4
  Top Layer w10: U6.28 2085,1535.4 2085,1550 v1(2160,1625) 2230,1695 3504.57,1695 LED4.1@3514.57,1685
  Top Layer w20: v2(1055,1645) 1058.71,1648.71 1058.71,1668.71 1162.52,1772.52 1174.92,1772.52 1185,1782.6 J5.5
  Bottom Layer w10: v2(1055,1645) 1165,1535 2070,1535 v1(2160,1625)
GND: C1.2 C3.2 C4.1 C5.1 C6.1 C7.1 C8.1 C14.1 C15.1 C16.1 C17.1 C18.1 C19.1 C20.1 C21.2 C22.1 C23.1 C24.2 C25.1 C26.2 C27.1 C28.1 C29.1 C30.1 C31.1 C32.1 F1.2 J6.9 J6.11 PS1.3 Q1.2 R6.1 R17.2 R18.1 R26.2 R27.1 R28.2 R31.2 R32.2 R33.2 R34.1 R35.2 R44.2 R45.2 R53.2 R54.2 R62.2 R63.2 U1.1 U2.1 U3.3 U6.2 U6.9 U6.10 U6.12 U6.19 U6.32 U6.36 U6.44 U6.47 | length 2092.7
  Top Layer w10: 1690,1510 1690,1505.22 1719.74,1475.47 U6.47 1749.73,1445 1750,1445 ; U6.2 1720.02,1365.02 1755,1400 ; U6.44 1793.24,1485 1795,1485 ; 1965,1525 1965,1526.76 U6.32 ; 1970,1345 1988.92,1345 U6.19
  Top Layer w20: 720,2460 U3.3
  Top Layer w40: C8.1 2023.62,3403.54 2039.76,3387.4 U2.1
  Top Layer w80: F1.2 3400,1050 3410,1060
  Bottom Layer w40: 1382.76,2412.76 2039.76,3069.76 U2.1
  other v1: 1990,1030 2030,1030 2070,1030 2460,1030 2500,1030 2820,1030 2860,1030 3720,1030 3760,1030 3800,1030 1990,1070 2030,1070 2070,1070 2460,1070 2500,1070 2820,1070 2860,1070 3720,1070 3760,1070 3800,1070 1990,1110 2030,1110 2070,1110 2460,1110 2500,1110 2820,1110 2860,1110 3720,1110 3760,1110 3800,1110 60,1640 100,1640 140,1640 180,1640 220,1640 260,1640 60,1680 100,1680 140,1680 180,1680 220,1680 260,1680 60,1720 100,1720 140,1720 180,1720 220,1720 260,1720 3010,1820 3050,1820 3090,1820 3010,1860 3050,1860 3090,1860 3010,1900 3050,1900 3090,1900 1030,2230 1070,2230 1110,2230 1030,2270 1070,2270 1110,2270 1030,2310 1070,2310 1110,2310
  other v2: 3380,1410 3380,1525 3380,1640
GND_RS485: C9.1 C10.1 C11.1 C12.1 C13.1 D2.3 D5.1 D6.1 IC1.5 J2.5 R15.1 U2.3 U4.3 U5.3
  other v1: 1260,2950 1140,3200 1140,3240 1140,3280 1840,3390 1840,3430 1100,3520 1140,3520 1180,3520 1220,3520 1840,3770 1840,3810
IAN: C21.1 R19.2 U6.4 | length 1553.9
  Top Layer w10: C21.1 442.31,1438.43 538.87,1535 1478.64,1535 1575,1438.64 1575,1389.85 1654.85,1310 1719.91,1310 1747.09,1337.18 U6.4
  Top Layer w40: C21.1 443.59,1435.19 443.59,1365.19 R19.2
IAP: C20.2 R16.2 U6.3 | length 1824.8
  Top Layer w10: C20.2 162.44,1438.43 274.01,1550 1484.85,1550 1590,1444.85 1590,1396.07 1661.07,1325 1707.07,1325 1733.17,1351.1 U6.3
  Top Layer w40: R16.2 162.15,1364.19 162.15,1436.18 C20.2
IBN: C24.1 R29.2 U6.6 | length 1070
  Top Layer w10: C24.1 940.65,1438.43 1007.22,1505 1466.21,1505 1545,1426.21 1545,1377.43 1642.43,1280 1746.08,1280 U6.6
  Top Layer w40: C24.1@941.93,1435.19 941.93,1365.19 R29.2
IBP: C22.2 R21.2 U6.5 | length 1342.7
  Top Layer w10: C22.2@660.5,1436.18 660.5,1438.15 742.35,1520 1472.43,1520 1560,1432.43 1560,1383.64 1648.64,1295 1733.24,1295 U6.5
  Top Layer w40: R21.2 660.5,1364.19 C22.2@660.5,1436.18
ICN: C26.1 R36.2 U6.8 | length 495.6
  Top Layer w10: R36.2 1516.09,1363.91 1630,1250 1771.27,1250 1802.77,1281.5 U6.8
  Top Layer w40: C26.1 1440.28,1435.19 1440.28,1365.19 R36.2
ICP: C25.2 R30.2 U6.7 | length 860.7
  Top Layer w10: C25.2@1158.85,1436.18 1158.85,1438.15 1210.7,1490 1460,1490 1530,1420 1530,1371.21 1636.21,1265 1758.92,1265 U6.7
  Top Layer w40: R30.2 1158.85,1364.19 C25.2@1158.85,1436.18
ISOL_RE: IC1.2 IC1.3 R8.1 U4.4 | length 448
  Top Layer w20: R8.1 721.96,3167.57 804.53,3085 895,3085 920.43,3059.57 920.43,2887.4 U4.4
  Top Layer w30: IC1.2@930,3022.54 IC1.3@960,3022.54
ISOL_RX: IC1.1 U3.2 | length 369.9
  Top Layer w20: U3.2@718.33,2880.18 720.69,2877.82 720.69,2859.31 750,2830 859.15,2830 870.87,2841.72 IC1.1
ISOL_TX: IC1.4 R10.1 U5.4 | length 489.1
  Top Layer w20: R10.1 796.96,3167.57 854.53,3110 950.24,3110 1020.87,3039.37 1020.87,3020.71 1022.54,3019.04 1050.96,3019.04 1120,2950 U5.4
NetC2_1: C2.1 J4.1 L1.1 VR1.2 | length 1081.7
  Top Layer w60: J4.1 2978.15,3531.85 3079.72,3430.28 3079.72,2968.5 C2.1 3260.83,2787.4 L1.1
NetC2_2: C2.2 J4.3 R1.1 VR1.1 | length 1156.7
  Top Layer w60: VR1.1 3378.15,3200 J4.3 3586.74,3649.61 3639.89,3702.76 R1.1
  Bottom Layer w60: VR1.1 3619.09,2952.76 C2.2
NetCT1_1: CT1.1 J1.6 | length 410.8
  Top Layer w80: CT1.1 162.09,340.47 J1.6
NetCT1_2: CT1.2 J1.5 | length 376.3
  Top Layer w80: CT1.2 445.55,257.01 J1.5
NetCT1_3: CT1.3 R16.1 R17.1 | length 185
  Top Layer w40: CT1.3 161.98,1181.21 161.98,1292.93 R16.1 R17.1
NetCT1_4: CT1.4 R18.2 R19.1 | length 186.2
  Top Layer w40: R18.2 R19.1 445.21,1292.7 445.21,1181.44 CT1.4
NetCT2_1: CT2.1 J1.4 | length 370.1
  Top Layer w80: CT2.1 660.43,429.57 713.62,376.38 713.62,188.94 J1.4
NetCT2_2: CT2.2 J1.3 | length 357.4
  Top Layer w80: J1.3 921.42,188.94 921.42,391.42 943.9,413.9 CT2.2
NetCT2_3: CT2.3 R21.1 R26.1 | length 185
  Top Layer w40: CT2.3 660.32,1181.21 660.32,1292.93 R21.1 R26.1
NetCT2_4: CT2.4 R27.2 R29.1 | length 186.2
  Top Layer w40: R27.2 R29.1 943.56,1292.7 943.56,1181.44 CT2.4
NetCT3_1: CT3.1 J1.2 | length 363.5
  Top Layer w80: J1.2 1117.52,190.56 1158.78,231.82 CT3.1
NetCT3_2: CT3.2 J1.1 | length 398.1
  Top Layer w80: J1.1 1442.24,309.76 CT3.2
NetCT3_3: CT3.3 R30.1 R32.1 | length 185
  Top Layer w40: CT3.3 1158.67,1181.21 1158.67,1292.93 R30.1 R32.1
NetCT3_4: CT3.4 R34.2 R36.1 | length 186.2
  Top Layer w40: R34.2 R36.1 1441.9,1292.7 1441.9,1181.44 CT3.4
NetD1_1: D1.1 K1.COIL2 R3.2 | length 516.3
  Top Layer w30: D1.1 366,2418.22 452.78,2418.22 R3.2 ; R3.2@461.96,2425.43 470.58,2434.06 470.58,2436.02 570,2535.44 570,2714.45 K1.COIL2
NetD3_2: D3.2 D5.2 | length 67.3
  Top Layer w30: D3.2 D5.2
NetD4_2: D4.2 D6.2 | length 89.8
  Top Layer w30: D4.2 1577.91,3437.76 1583.58,3432.09 D6.2
NetF1_1: F1.1 J3.4 | length 380.2
  Top Layer w80: J3.4 3400,290.35 F1.1
NetJ2_1: J2.1 K1.NC | length 533.5
  Top Layer w70: K1.NC 170,3216.26 170,3568.23 J2.1
NetJ2_2: J2.2 K1.COM | length 1034.8
  Bottom Layer w70: K1.COM 319.88,3439.88 450.75,3570.75 450.75,3648.98 J2.2
NetJ2_3: J2.3 K1.NO | length 536.1
  Bottom Layer w70: K1.NO 516.73,3356.73 651.38,3491.38 J2.3
NetJ2_6: J2.6 R12.2 R13.2 | length 1171.8
  Top Layer w40: R12.2 818.88,3434.84 945,3560.96 945,3726.57 968.43,3750 1150.98,3750 J2.6 1356.89,3755.12 R13.2
NetJ2_7: J2.7 R13.1 R14.2 | length 504.2
  Top Layer w40: R14.2 1304.12,3502.35 J2.7 1653.43,3649.61 1658.16,3644.88 R13.1
NetJ3_1: J3.1 R37.2 | length 242.4
  Top Layer w50: R37.2@2335,402.76 2335,244.72 J3.1
NetJ3_2: J3.2 R46.2 | length 205
  Top Layer w50: J3.2 R46.2@2694.65,389.97
NetJ3_3: J3.3 R55.2 | length 235.4
  Top Layer w50: J3.3 2994.68,198.68 3044.03,248.02 R55.2@3044.03,400
NetJ5_6: J5.6 U6.34 | length 1116.5
  Top Layer w10: J5.6 1200.08,2055.06 1200.08,2075.08 1250,2125 1436.07,2125 1871.07,1690 1935.15,1690 1995,1630.15 1995,1612.93 1968.9,1586.83 U6.34
NetJ5_8: J5.8 U6.33 | length 1264.6
  Top Layer w10: J5.8 1085,2057.4 1167.6,2140 1442.28,2140 1877.28,1705 1941.36,1705 2015,1631.36 2015,1604.6 U6.33
NetJ5_10: J5.10 U6.31 | length 1422.3
  Top Layer w10: J5.10 985,2057.4 1000.08,2072.48 1002.48,2072.48 1085,2155 1448.49,2155 1883.49,1720 1947.57,1720 2035,1632.57 2035,1569.41 2010.66,1545.07 U6.31
NetJ5_12: J5.12 U6.30 | length 1567.8
  Top Layer w10: J5.12 885,2057.4 900.08,2072.48 902.48,2072.48 1000,2170 1454.71,2170 1889.71,1735 1953.79,1735 2050,1638.79 2050,1556.57 2024.58,1531.15 U6.30
NetJ6_1: J6.1 U6.29 | length 1988.2
  Top Layer w10: J6.1 690,1817.44 795,1922.44 795,2060 885,2150 920,2185 1460.92,2185 1895.92,1750 1960,1750 2065,1645 2065,1543.24 U6.29
NetJ6_2: J6.2 U5.2 | length 887.2
  Top Layer w20: J6.2 690,2057.4 1012.6,2380 1140,2380 1220,2460 U5.2
NetJ6_3: J6.3 U6.22 | length 2139.4
  Top Layer w10: U6.22 2066.83,1351.1 2097.93,1320 2119.7,1320 2227.89,1428.19 2227.89,1438.19 2227.61,1438.48 2227.61,1457.39 v1(2225,1460)
  Top Layer w20: v2(590,1645) J6.3
  Bottom Layer w10: v2(590,1645) 590,1610 740,1460 v1(2225,1460)
NetJ6_4: J6.4 U4.2 | length 771.2
  Top Layer w20: J6.4 590,2057.4 1020,2487.4 U4.2
NetJ6_5: J6.5 U6.24 | length 2130.7
  Top Layer w10: U6.24 2094.65,1379.41 2094.65,1379.65 2144.11,1429.11 v1(2190.89,1429.11)
  Top Layer w20: v2(490,1645) J6.5
  Bottom Layer w10: v2@490,1660 490,1555 600,1445 2131.21,1445 2147.11,1429.11 v1(2190.89,1429.11)
NetJ6_7: J6.7 U6.23 | length 2208.7
  Top Layer w10: U6.23 2107.74,1337.53 2116.03,1337.53 2144.25,1365.76 2144.25,1378.78 2158.39,1392.92 v1(2158.39,1396.61)
  Top Layer w20: v2(390,1645) J6.7
  Bottom Layer w10: v2(390,1645) 390,1545 505,1430 2125,1430 v1(2158.39,1396.61)
NetJ6_8: J6.8 R2.2 U3.4 | length 779.7
  Top Layer w20: J6.8 399.99,2049.97 399.99,2089.99 770,2460 770,2510 791.81,2531.81 806.37,2531.81 R2.2 U3.4
NetJ6_10: J6.10 R5.1 | length 215.8
  Top Layer w20: R5.1@236.38,2233.57 236.38,2171.91 290,2118.28 J6.10
NetL1_2: L1.2 PS1.2 | length 486.6
  Top Layer w60: PS1.2 3222.44,2409.45 L1.2
NetL1_3: L1.3 PS1.1 | length 945
  Bottom Layer w60: PS1.1 2905.51,2374.49 3080,2200 3366.34,2200 L1.3
NetL1_4: L1.4 R1.2 | length 555.2
  Top Layer w60: L1.4 3575.79,3145.79 3627.97,3197.97 3641.87,3197.97 R1.2
NetLED1_2: LED1.2 R28.1 | length 518.4
  Top Layer w10: LED1.2 3585.43,1361.97 3655,1431.54 3655,1795.77 R28.1
NetLED2_2: LED2.2 R31.1 | length 425.4
  Top Layer w10: R31.1 3640,1789.56 3640,1528.21 3585.43,1473.64 LED2.2
NetLED3_2: LED3.2 R33.1 | length 333.5
  Top Layer w10: R33.1 3506.96,1849.57 3625,1731.53 3625,1624.88 3585.43,1585.31 LED3.2
NetLED4_2: LED4.2 R35.1 | length 218.6
  Top Layer w10: R35.1@3430.87,1849.57 LED4.2
NetQ1_1: Q1.1 R5.2 R6.2 | length 145.3
  Top Layer w20: R6.2 320.84,2295.59 Q1.1@377.68,2295.59
  Top Layer w40: R5.2 R6.2
NetQ1_3: Q1.3 R3.1 | length 96.7
  Top Layer w30: R3.1 468,2346.56 Q1.3@468,2261.19
NetR4_1: R4.1 U3.1 | length 157.8
  Top Layer w20: R4.1 788.43,3023.03 802.06,3009.4 804.02,3009.4 819.31,2994.12 U3.1@819.31,2881.16
NetR7_2: R7.2 U4.1 | length 87.6
  Top Layer w20: R7.2 U4.1
NetR9_2: R9.2 U5.1 | length 87.6
  Top Layer w20: R9.2 U5.1
NetR37_1: R37.1 R38.2 | length 69.6
  Top Layer w40: R37.1 R38.2
NetR38_1: R38.1 R39.2 | length 76.7
  Top Layer w40: R39.2 2262.07,617.5 2332.94,617.5 R38.1
NetR39_1: R39.1 R40.2 | length 76.7
  Top Layer w40: R39.1 2262.07,692.5 2332.94,692.5 R40.2
NetR40_1: R40.1 R41.2 | length 76.7
  Top Layer w40: R41.2 2262.07,767.5 2332.94,767.5 R40.1
NetR41_1: R41.1 R42.2 | length 76.7
  Top Layer w40: R41.1 2262.07,842.5 2332.94,842.5 R42.2
NetR42_1: R42.1 R43.2 | length 76.7
  Top Layer w40: R43.2 2262.07,917.5 2332.94,917.5 R42.1
NetR46_1: R46.1 R47.2 | length 69.6
  Top Layer w40: R46.1 R47.2
NetR47_1: R47.1 R48.2 | length 76.7
  Top Layer w40: R48.2 2621.69,615.04 2692.55,615.04 R47.1
NetR48_1: R48.1 R49.2 | length 76.7
  Top Layer w40: R48.1 2621.69,690.04 2692.55,690.04 R49.2
NetR49_1: R49.1 R50.2 | length 76.7
  Top Layer w40: R50.2 2621.69,765.04 2692.55,765.04 R49.1
NetR50_1: R50.1 R51.2 | length 76.7
  Top Layer w40: R50.1 2621.69,840.04 2692.55,840.04 R51.2
NetR51_1: R51.1 R52.2 | length 76.7
  Top Layer w40: R52.2 2621.69,915.04 2692.55,915.04 R51.1
NetR55_1: R55.1 R56.2 | length 69.6
  Top Layer w40: R55.1 R56.2
NetR56_1: R56.1 R57.2 | length 76.7
  Top Layer w40: R57.2 2971.11,624.33 3041.97,624.33 R56.1
NetR57_1: R57.1 R58.2 | length 76.7
  Top Layer w40: R57.1 2971.11,699.33 3041.97,699.33 R58.2
NetR58_1: R58.1 R59.2 | length 76.7
  Top Layer w40: R59.2 2971.11,774.33 3041.97,774.33 R58.1
NetR59_1: R59.1 R60.2 | length 76.7
  Top Layer w40: R59.1 2971.11,849.33 3041.97,849.33 R60.2
NetR60_1: R60.1 R61.2 | length 76.7
  Top Layer w40: R61.2 2971.11,924.33 3041.97,924.33 R60.1
NetU6_20: U6.20 X1.1 | length 780.5
  Top Layer w10: U6.20 2071.76,1290 2132.13,1290 2222.13,1380 2505.04,1380 2645.04,1520 X1.1
NetU6_21: U6.21 X1.2 | length 410.5
  Top Layer w10: U6.21 2052.91,1337.18 2085.09,1305 2125.92,1305 2287.24,1466.32 2287.24,1501.38 2305.86,1520 X1.2
NRESET: C23.2 R20.1 U6.41 | length 630.1
  Top Layer w10: C23.2@1436.96,1685.43 1541.53,1790 1665,1790 1780,1675 1780,1581.76 U6.41
  Top Layer w30: R20.1 C23.2@1429.99,1685.43
PPEM_CK: J5.2 R23.1 U6.38 | length 1067.7
  Top Layer w10: J5.2 1385,2022.56 1497.56,1910 1608.64,1910 1825,1693.64 1825,1620.76 1845.02,1600.75 U6.38 ; v1(1815,1910) 1815.43,1910.43 R23.1@1870.01,1910.43
  Bottom Layer w10: v1(1500,1910) v1@1817.13,1910
PPEM_CS: J5.4 R22.1 U6.37 | length 1364.6
  Top Layer w10: J5.4 1285,2057.4 1300.08,2072.48 1302.48,2072.48 1340,2110 1429.85,2110 1552.43,1987.43 ; v1(1530,1965) 1552.43,1987.43 ; U6.37 1858.94,1615.01 1842.93,1631.02 1842.93,1696.92 1552.43,1987.43 ; v1(1935,1965) 1937.61,1962.39 1946.67,1962.39 1960.01,1949.06 R22.1
  Bottom Layer w10: v1(1530,1965) v1(1935,1965)
PPEM_DI: J5.3 R24.1 U6.40 | length 842.6
  Top Layer w10: J5.3@1285,1782.6 1332.6,1735 1460,1735 1530,1805 1671.21,1805 1795,1681.21 1795,1595.09 1817.18,1572.91 U6.40
  Top Layer w20: R24.1 1285,1782.6 J5.3
PPEM_DO: J5.1 R25.1 U6.39 | length 967.5
  Top Layer w10: R25.1 1223.15,1698.57 1222.41,1699.31 1222.41,1732.41 v1(1224.07,1734.07) ; J5.1 1385,1804.92 1400.08,1820 1677.43,1820 1810,1687.43 1810,1607.93 1831.1,1586.83 U6.39
  Bottom Layer w10: v1(1224.07,1734.07) 1310,1820 v1(1500,1820)
RS485_A: C12.2 D2.1 D3.1 IC1.6 R11.1 R12.1 | length 1411.7
  Top Layer w20: C12.2 1261.43,3155.97 1340,3234.54 v3(1340,3320) ; D2.1 D2.1 1266.21,3318.12 1338.12,3318.12 v3(1340,3320) ; D3.1 1758.19,3422.09 1706.1,3370 1513.04,3370 1459.28,3316.24 1343.76,3316.24 v3(1340,3320)
  Top Layer w25: R11.1 888.44,3340 v3(950,3340) 950,3394.28 929.12,3415.16 R12.1 ; v3@951.4,3333.36 951.4,3298.6 970.18,3279.82 970.18,3237.89 IC1.6
  Bottom Layer w25: v3(950,3340) 1314.23,3340 1334.23,3320 v3(1340,3320)
RS485_B: C13.2 D2.2 D4.1 IC1.7 R14.1 R15.2 | length 960.6
  Top Layer w20: IC1.7 920.87,3189.64 935.51,3175 1070.79,3175 1085.43,3189.64 C13.2 ; D2.2 1189.6,3368.48 ; R14.1 1189.6,3420.72 1189.6,3368.48 ; D4.1 1442.09,3428.19 1431.42,3417.52 1419.61,3417.52 1370.57,3368.48 1189.6,3368.48
  Top Layer w25: C13.2 R15.2 R15.2@1091.43,3419 ; R14.1@1187.89,3419 R14.1
  Top Layer w30: R15.2@1091.43,3419 R14.1@1187.89,3419
VAN: C28.2 R45.1 U6.14 | length 466.2
  Top Layer w10: U6.14 2009.73,1185 2133.2,1185 2223.63,1275.43 R45.1
  Top Layer w20: R45.1 2273.63,1261.81 2288.62,1261.81 2319.4,1231.02 2319.4,1229.06 2333.03,1215.43 C28.2
VAP: C27.2 R43.1 R44.1 U6.13 | length 539.5
  Top Layer w10: U6.13 1996.89,1170 2159.56,1170 R44.1
  Top Layer w40: R44.1 R43.1 2262.07,992.5 2332.94,992.5 C27.2
VBN: C30.2 R54.1 U6.16 | length 833.8
  Top Layer w10: U6.16 1983.31,1267.58 2035.89,1215 2120.77,1215 2240.77,1335 2555.63,1335 2617.65,1272.97 R54.1
  Top Layer w20: R54.1 2633.24,1259.35 2646.26,1259.35 2692.64,1212.97 C30.2
VBP: C29.2 R52.1 R53.1 U6.15 | length 983.2
  Top Layer w10: U6.15 2022.56,1200 2126.98,1200 2246.98,1320 2364.75,1320 2617.64,1067.11 R53.1
  Top Layer w40: R52.1 R53.1 ; R52.1 2621.69,990.04 2692.55,990.04 C29.2
VCN: C32.2 R63.1 U6.18 | length 1163.1
  Top Layer w10: U6.18 2061.08,1245 2108.34,1245 2228.34,1365 2884.34,1365 R63.1@2967.07,1282.27
  Top Layer w20: R63.1@2967.07,1282.27 2980.69,1268.64 2995.68,1268.64 3042.06,1222.27 C32.2
VCP: C31.2 R61.1 R62.1 U6.17 | length 1312.5
  Top Layer w10: U6.17 1997.23,1281.5 2048.73,1230 2114.56,1230 2234.56,1350 2693.46,1350 2967.06,1076.4 R62.1
  Top Layer w40: R62.1 R61.1 2971.11,999.33 3041.97,999.33 C31.2
VDD18: C16.2 C17.2 U6.42 U6.43 | length 242
  Top Layer w10: C16.2 1681.14,1624.94 U6.43 U6.42
  Top Layer w30: C17.2 C16.2
VREF: C18.2 C19.2 U6.11 | length 198.6
  Top Layer w10: C19.2@1764.94,1159.67 1772.63,1167.36 U6.11 ; C19.2 C19.2@1774.94,1179.67
  Top Layer w30: C18.2@1724.94,1115.05 C19.2
pads on no net: J2.4 J4.2 J5.13 J5.14 J5.15 J5.16 J5.17 J5.18 J5.19 J5.20 J5.21 J5.22 J5.23 J5.24 J6.13 J6.14 J6.15 J6.16 J6.17 J6.18 J6.19 J6.20 J6.21 J6.22 J6.23 J6.24 U6.35 U6.45 U6.46

## Polygon pours and split planes (outlines as drawn)
GND on Top Layer "NONET_L-01_P-001" (solid, remove dead copper, pour order 3): 0,2480 0,1000 3840,1000 3840,1970 2720,1970 2580,2110 1850,2110 1480,2480
GND_RS485 on Top Layer "NONET_L-01_P-001" (solid, remove dead copper, pour order 0): 920,3840 920,3380 830,3290 830,2820 1190,2820 1570,3200 1810,3200 1870,3260 1870,3840
GND on Bottom Layer "NONET_L-01_P-001" (solid, remove dead copper, pour order 4): 0,2480 0,1000 3840,1000 3840,1970 2720,1970 2580,2110 1850,2110 1480,2480
GND_RS485 on Bottom Layer "NONET_L-01_P-001" (solid, remove dead copper, pour order 1): 920,3840 920,3380 830,3290 830,2820 1190,2820 1570,3200 1810,3200 1870,3260 1870,3840

## Keep-outs
Keep-Out Layer:
  lines w5.91: 0,0 3838.58,0 3838.58,374.02 3759.84,374.02 3759.84,472.44 3838.58,472.44 3838.58,1870.08 3759.84,1870.08 3759.84,1968.5 3838.58,1968.5 3838.58,3366.14 3759.84,3366.14 3759.84,3464.57 3838.58,3464.57 3838.58,3838.58 0,3838.58 0,3464.57 78.74,3464.57 78.74,3366.14 0,3366.14 0,1968.5 78.74,1968.5 78.74,1870.08 0,1870.08 0,472.44 78.74,472.44 78.74,374.02 0,374.02 0,0
  lines w30: 610,3000 610,3300 ; 2534,552 2535,140 ; 2851.5,552 2852.5,140 ; 3169,552 3170,140 ; 3185,2565 3635,2565
  lines w40: 145,2545 485,2545 ; 2580,2950 2580,2400 2910,2070 3500,2070

## Silkscreen, mask and mechanical layers (free items; w line width, h text height)
Top Overlay:
  region: 131 vertices and 2 holes, not listed, extent 3285.34,845.1 3628.7,1188.45
Bottom Overlay:
  text "+5V" at 172.55,2020 h50 r270
  text "Relay" at 276.05,2020 h50 r270
  text "RX" at 377.54,2020 h50 r270
  text "+3.3V" at 477.39,2020 h50 r270
  text "RE" at 577.21,2020 h50 r270
  text "TX" at 676.84,2020 h50 r270
  text "IRQ0" at 872.34,2020 h50 r270
  text "IRQ1" at 973.2,2020 h50 r270
  text "PM0" at 1073.29,2020 h50 r270
  text "PM1" at 1172.51,2020 h50 r270
  text "CS" at 1271.85,2020 h50 r270
  text "CK" at 1371.55,2020 h50 r270
  text "ZX1" at 370.7,1748.66 h50 r270
  text "CF1" at 867.4,1747.55 h50 r270
  text "ZX2" at 471.8,1742.79 h50 r270
  text "ZX0" at 573.12,1742.56 h50 r270
  text "CF2" at 967.63,1741.68 h50 r270
  text "CF3" at 1067.86,1741.36 h50 r270
  text "CF4" at 1168.09,1741.5 h50 r270
  text "GND" at 169.55,1726.99 h50 r270
  text "GND" at 269.24,1726.99 h50 r270
  text "MOSI" at 1268.32,1714.65 h50 r270
  text "MISO" at 1368.55,1712.62 h50 r270
  text "WarnOut" at 674.4,1643.64 h50 r270

## Text inside footprints (layer, text, board x,y; h text height)
CT1: Top Overlay "IN" at 338.82,576.3 h60 r90
CT2: Top Overlay "IN" at 837.17,576.3 h60 r90
CT3: Top Overlay "IN" at 1335.51,576.3 h60 r90